# Altium PCB OksLab_CanToUsb_HW01.PcbDoc (part 1 of 2)
Units mm, origin at the board's own origin, x right, y up, seen from the top; angles counter-clockwise.
Board outline 66.93 x 34.29 mm, 2 copper layers (Top Layer, Bottom Layer), stack 1.57 mm thick; 51 components, 41 nets, 199 pads, 83 vias.
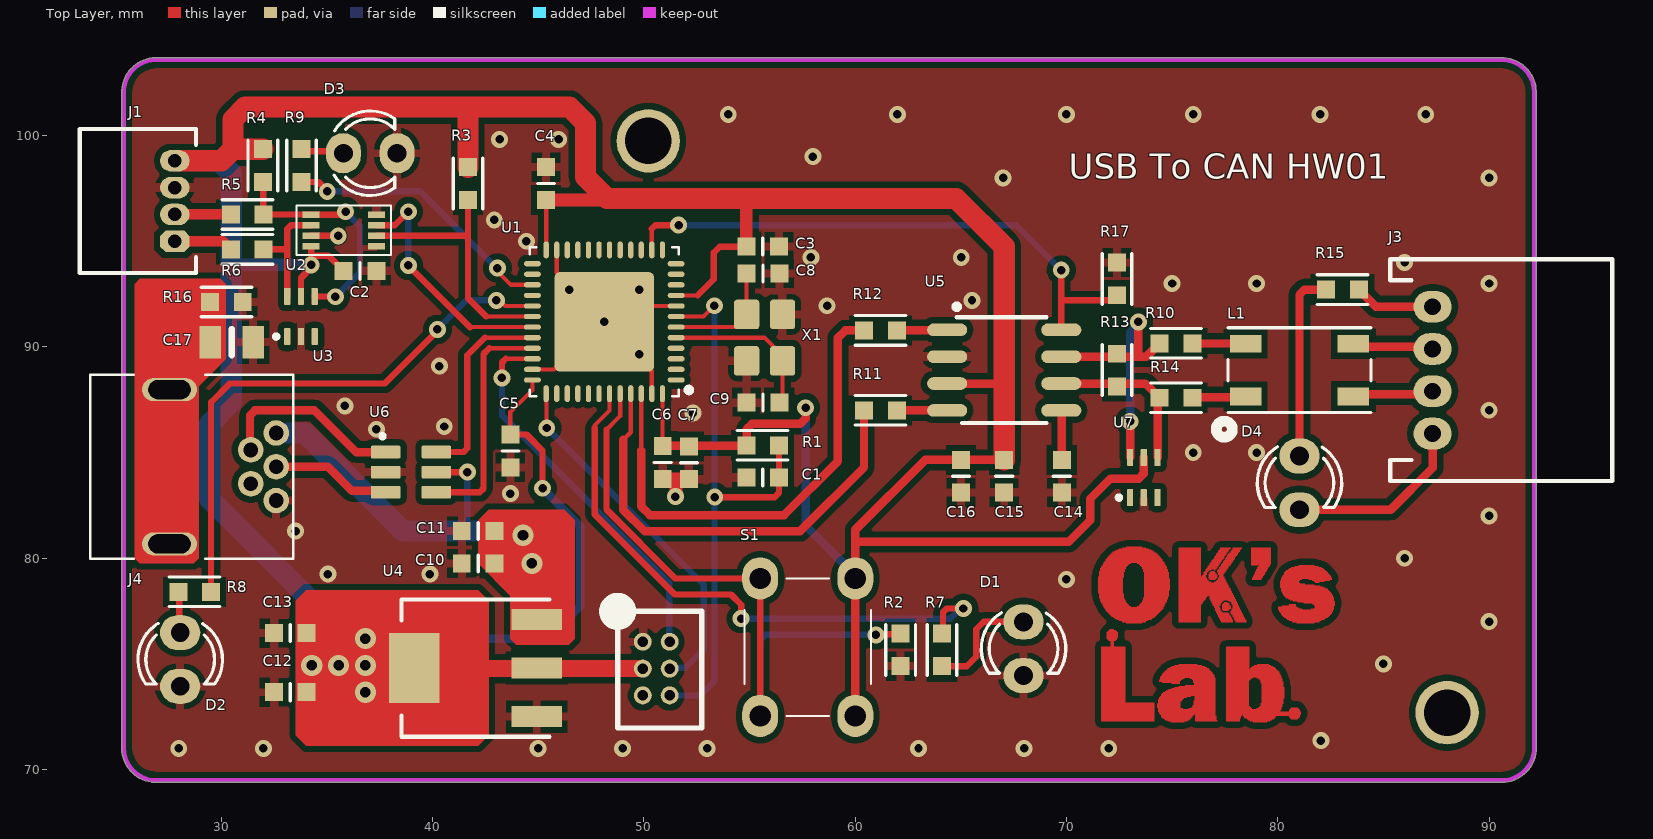
[diagram p0: Top Layer view]
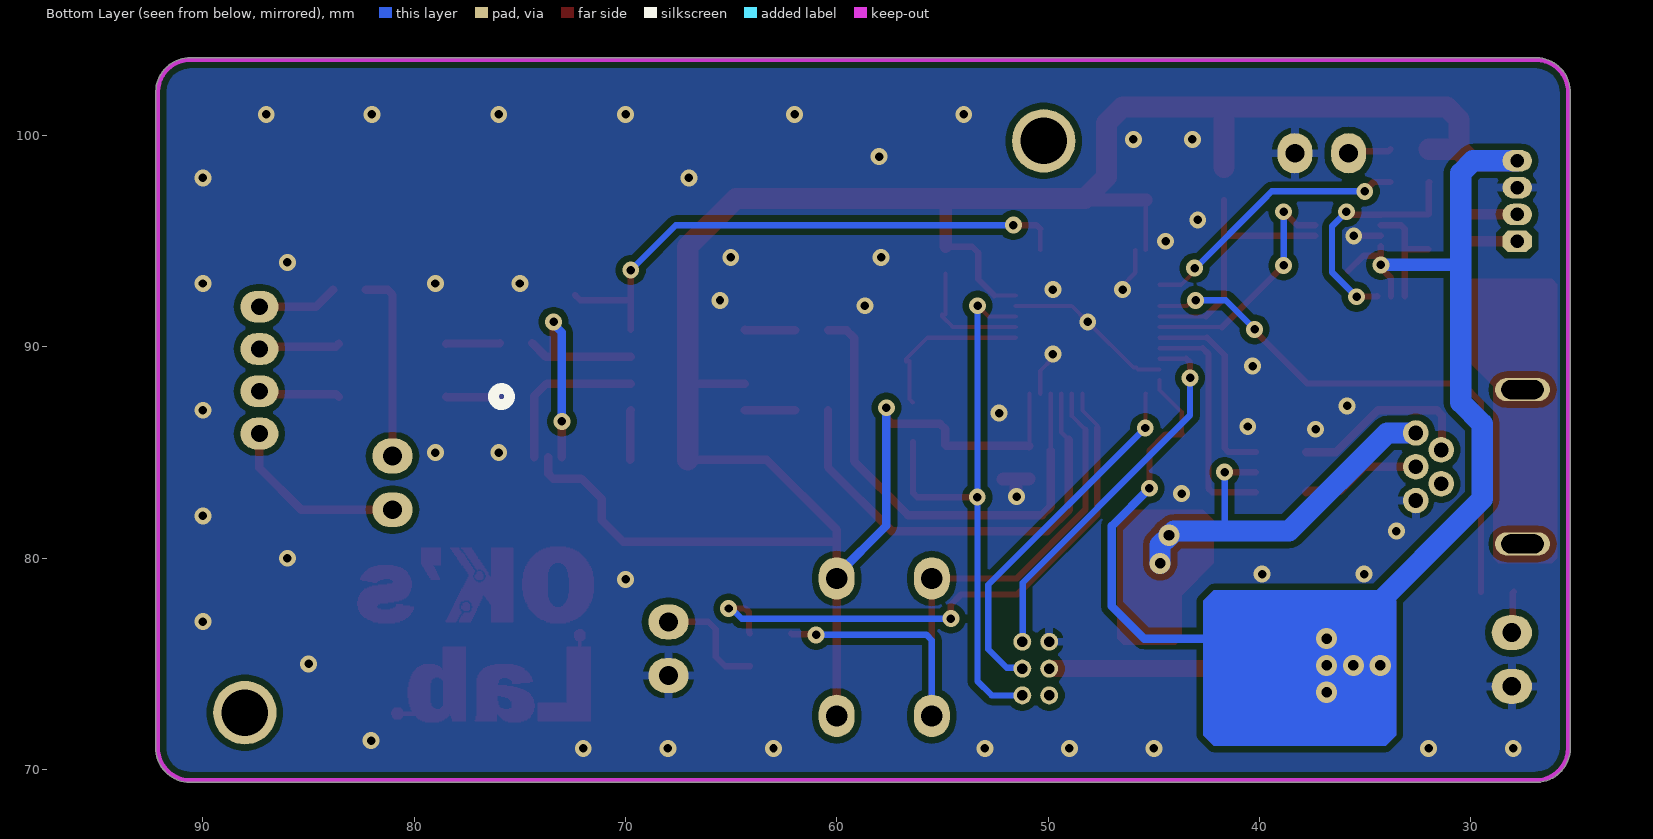
[diagram p1: Bottom Layer view, seen from below]
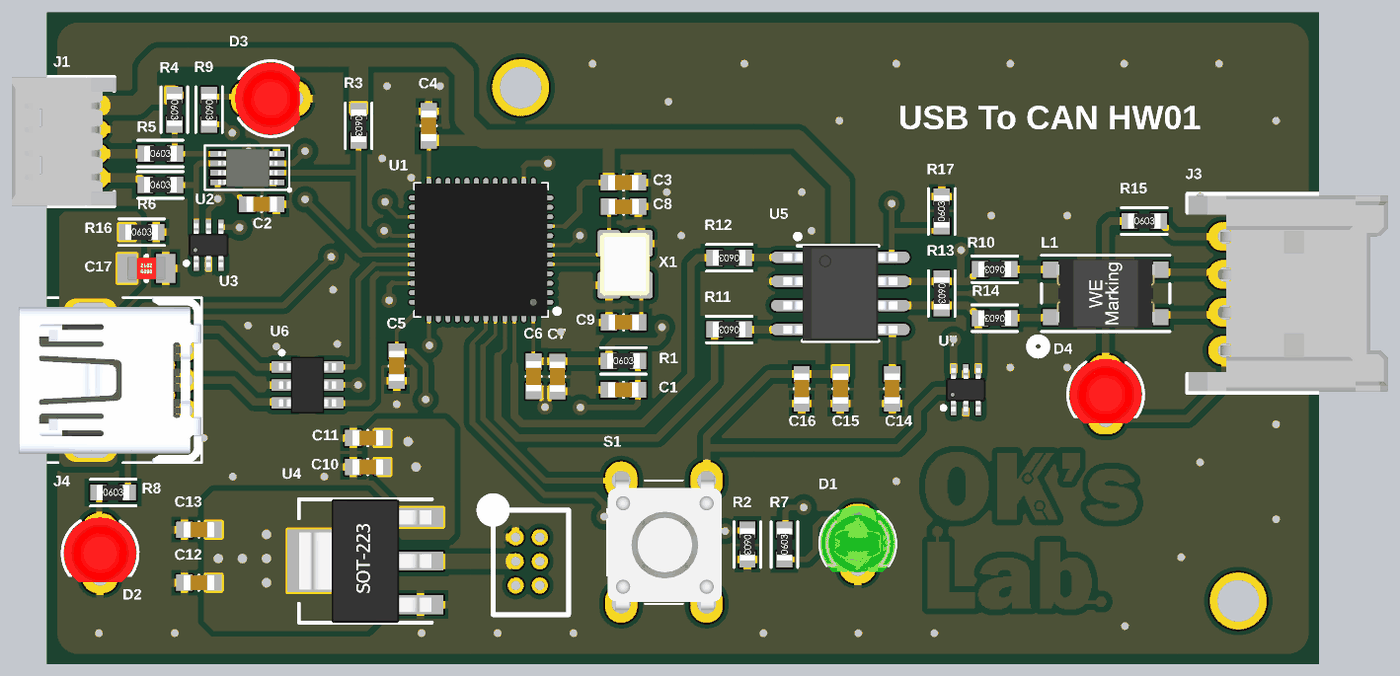
[diagram p2: 3D render of the assembled board from above, using the file's embedded part models]

## Layer stack, top to bottom
Top Solder: solder mask 0.01, Solder Resist, Dk 3.5
Top Layer: signal copper 0.035
Dielectric 1: dielectric 1.5, FR-4, Dk 4.8
Bottom Layer: signal copper 0.035
Bottom Solder: solder mask 0.01, Solder Resist, Dk 3.5

## Board outline
26.976,69.394 cw(c26.937,71.031) 25.3,70.991 cw(c25.4,70.993) 25.3,70.993 25.3,102.005 cw(c26.937,102.044) 26.896,103.682 cw(c26.899,103.581) 26.899,103.682 90.574,103.682 cw(c90.589,102.044) 90.604,103.682 90.678,103.682 cw(c90.678,103.581) 90.707,103.677 cw(c90.589,102.044) 92.226,102.085 cw(c92.126,102.082) 92.226,102.082 92.226,71.07 cw(c90.589,71.031) 92.227,71.031 cw(c90.589,71.031) 90.63,69.394 cw(c90.627,69.494) 90.627,69.394 26.976,69.394 ccw(c26.937,71.031)

## Design rules (kind name [scope] priority, off if disabled: settings)
Clearance Clearance_1 [InNamedPolygon('TOP_GND') Or InNamedPolygon('BOTTOM_GND')] p1: gap=0.3 ignorepadtopadclearanceinfootprint=FALSE
Clearance [All] p2: gap=0.2 ignorepadtopadclearanceinfootprint=FALSE
MinimumSolderMaskSliver [All] p1: minsoldermaskwidth=0.01
PolygonConnect PolygonConnect_1 [All vs IsNamedPolygon('TOP_GND') Or IsNamedPolygon('BOTTOM_GND')] p1: thpad.connectstyle=Relief thpad.reliefconductorwidth=0.4 thpad.reliefentries=4 thpad.polygonreliefangle="90 Angle" thpad.airgapwidth=0.254 smdpad.connectstyle=Relief smdpad.reliefconductorwidth=0.4 smdpad.reliefentries=4 smdpad.polygonreliefangle="90 Angle" smdpad.airgapwidth=0.254 via.connectstyle=Direct via.reliefconductorwidth=0.254 via.reliefentries=4 via.polygonreliefangle="90 Angle" via.airgapwidth=0.254
PolygonConnect [All] p2: connectstyle=Relief reliefconductorwidth=0.254 reliefentries=4 polygonreliefangle="90 Angle" airgapwidth=0.254
RoutingVias [All] p1: holewidth=0.4 width=0.8 viastyle="Through Hole" minholewidth=0.3 minwidth=0.6 maxholewidth=3 maxwidth=3
SilkToSilkClearance [All] p1: silktosilkclearance=0.1
SilkToSolderMaskClearance [IsPad] p1: minsilkscreentomaskgap=0.05 clearancetoexposedcopper=TRUE
SolderMaskExpansion [All] p1: expansion=0.102 istentingtop=FALSE
Width [All] p1: maxlimit=1.2 minlimit=0.2 preferedwidth=0.3
27 further rules are at their usual default settings.

## Components (designator, comment, footprint, x,y, rotation, side; value= is the part's Value field where it differs from the comment)
C1 "0.10µF" SMD-0603C 55.626,83.82 r270 top
C2 "0.10µF" SMD-0603C 36.576,93.599 r90 top
C3 "0.10µF" SMD-0603C 55.626,94.742 r90 top
C4 "0.10µF" SMD-0603C 45.37,97.727 r180 top
C5 "0.10µF" SMD-0603C 43.688,85.077 r0 top
C6 "0.10µF" SMD-0603C 50.898,84.534 r0 top
C7 "4.7µF" SMD-0603C 52.146,84.516 r0 top
C8 "16pF" SMD-0603C 55.639,93.472 r90 top
C9 "16pF" SMD-0603C 55.639,87.376 r270 top
C10 "4.7µF" SMD-0603C 42.164,79.756 r270 top
C11 "0.10µF" SMD-0603C 42.164,81.28 r270 top
C12 "4.7µF" SMD-0603C 33.274,73.66 r270 top
C13 "0.10µF" SMD-0603C 33.274,76.454 r270 top
C14 "0.10µF" SMD-0603C 69.78,83.878 r0 top
C15 "0.10µF" SMD-0603C 67.056,83.878 r0 top
C16 "1µF" SMD-0603C 65.012,83.878 r0 top
C17 "4700pF" SMD-0805C 30.505,90.221 r90 top
D1 "LN38GPX" Led-3mm-Green-h7 67.97,75.717 r270 top
D2 "LN28RPX" Led-3mm-Red-h7 28.067,75.209 r270 top
D3 "LN28RPX" Led-3mm-Red-h7 37.059,99.162 r0 top
D4 "LN28RPX" Led-3mm-Red-h7 81.026,83.566 r270 top
J1 "53048-0410" CONN_4_POS__0530480410 27.813,96.901 r270 top
J3 "0353630460" CONN_4_POS__0353630460 87.326,88.9 r90 top
J4 "2172034-1" USB_MINI__2172034-1 27.559,84.328 r180 top
L1 "744212510" "CM_6.50mm x 3.60mm" 81.026,88.9 r0 top
R1 "10k" SMD-0603-RES 55.626,85.344 r270 top
R2 "10k" SMD-0603-RES 62.154,75.667 r180 top
R3 "100k" SMD-0603-RES 41.681,97.727 r180 top
R4 "100k" SMD-0603-RES 31.979,98.577 r180 top
R5 "22" SMD-0603-RES 31.242,96.266 r270 top
R6 "22" SMD-0603-RES 31.242,94.615 r270 top
R7 "330" SMD-0603-RES 64.11,75.667 r0 top
R8 "330" SMD-0603-RES 28.753,78.41 r270 top
R9 "330" SMD-0603-RES 33.807,98.577 r180 top
R10 "330" SMD-0603-RES 75.184,90.17 r90 top
R11 "22" SMD-0603-RES 61.197,86.997 r90 top
R12 "22" SMD-0603-RES 61.197,90.782 r90 top
R13 "120" SMD-0603-RES 72.39,88.9 r180 top
R14 "330" SMD-0603-RES 75.184,87.593 r90 top
R15 "330" SMD-0603-RES 83.058,92.71 r270 top
R16 "1M" SMD-0603-RES 30.251,92.126 r270 top
R17 "10k" SMD-0603-RES 72.39,93.218 r0 top
S1 "DTS-66N-V" Tact_THD_6x6_13mm 57.76,75.794 r0 top
U1 "STM32F103C8T6" QFN48-(7mmX7mm) 48.133,91.186 r180 top
U2 "SN74AUP2G125DCUR" VFSOP_8 35.814,95.504 r180 top
U3 "NUP4202W1T2G" SOT-363 33.782,91.44 r0 top
U4 "LD1117S33CTR" SOT223-3N 42.037,74.803 r180 top
U5 "SN65HVD1050DR" SOIC-8_L 67.056,88.9 r0 top
U6 "USBLC6-2SC6" SOT23-6 38.989,84.074 r270 top
U7 "NUP4202W1T2G" SOT-363 73.66,83.82 r0 top
X1 "7M-16.000MAAJ-T" XTAL_3.2mm_2.5mm_4pad 55.718,90.436 r270 top

## Footprints (in the part's own frame and the unit in brackets; to place one, negate y for a bottom-side part, rotate by r counter-clockwise, add the part's x,y. Pads: shape width x height; smd on the part's side, far side on the other; paste and mask are expansions set on the pad)
"CM_6.50mm x 3.60mm" [mm]
  rect 1.499x0.838 smd: 1(-2.55,-1.25) 3(-2.55,1.25) 4(2.55,1.25) 5(2.55,-1.25)
  silkscreen extent -3.94,-3.17 3.38,2.01, body extent -2.6,-1.8 2.6,1.8, height 1.5
CONN_4_POS__0353630460 [mm]
  oval 1.5x1.8 hole 0.8: 1(-3,0) 2(-1,0) 3(1,0) 4(3,0)
  silkscreen extent -5.25,-8.5 5.25,2, body extent -5.15,-8.55 5.15,1.95, height 5.55
CONN_4_POS__0530480410 [mil]
  oct 40x55 hole 25: 1(75,0)
  oval 40x55 hole 25: 2(25,0) 3(-25,0) 4(-75,0)
  silkscreen extent -134,-177 134,39, body extent -133,-173 133,43, height 140
Led-3mm-Green-h7 [mil]
  oval 65x75 hole 35: 1(-50,0) 2(50,0)
  silkscreen extent -67,-79 46,79, body extent -78,-78 62,78, height 354
Led-3mm-Red-h7 [mil]
  oval 65x75 hole 35: 1(-50,0) 2(50,0)
  silkscreen extent -67,-79 46,79, body extent -75,-75 60,75, height 261
QFN48-(7mmX7mm) [mm] "QFN, 48-Leads, Body 7,1x7,1mm (max), Pitch 0,50mm, IPC Medium Density"
  rrect10% 4.7x4.7 smd mask+0.076: 0(0,0)
  oval 0.8x0.25 smd mask+0.076: 1(-3.4,2.75) 2(-3.4,2.25) 3(-3.4,1.75) 4(-3.4,1.25) 5(-3.4,0.75) 6(-3.4,0.25) 7(-3.4,-0.25) 8(-3.4,-0.75) 9(-3.4,-1.25) 10(-3.4,-1.75) 11(-3.4,-2.25) 12(-3.4,-2.75) 25(3.4,-2.75) 26(3.4,-2.25) 27(3.4,-1.75) 28(3.4,-1.25) 29(3.4,-0.75) 30(3.4,-0.25) 31(3.4,0.25) 32(3.4,0.75) 33(3.4,1.25) 34(3.4,1.75) 35(3.4,2.25) 36(3.4,2.75)
  oval 0.25x0.8 smd mask+0.076: 13(-2.75,-3.4) 14(-2.25,-3.4) 15(-1.75,-3.4) 16(-1.25,-3.4) 17(-0.75,-3.4) 18(-0.25,-3.4) 19(0.25,-3.4) 20(0.75,-3.4) 21(1.25,-3.4) 22(1.75,-3.4) 23(2.25,-3.4) 24(2.75,-3.4) 37(2.75,3.4) 38(2.25,3.4) 39(1.75,3.4) 40(1.25,3.4) 41(0.75,3.4) 42(0.25,3.4) 43(-0.25,3.4) 44(-0.75,3.4) 45(-1.25,3.4) 46(-1.75,3.4) 47(-2.25,3.4) 48(-2.75,3.4)
  silkscreen extent -4.13,-3.53 3.53,3.52, body extent -3.51,-3.51 3.51,3.51, height 0.78
SMD-0603-RES [mm]
  rect 0.85x0.85 smd: 1(0,0.775) 2(0,-0.775)
  silkscreen extent -0.7,-1.2 0.7,1.2, body extent -0.4,-0.85 0.4,0.85, height 0.56
SMD-0603C [mm]
  rect 0.85x0.85 smd: 1(0,0.775) 2(0,-0.775)
  silkscreen extent -0.4,0 0.4,0, body extent -0.4,-0.8 0.4,0.8, height 0.9
SMD-0805C [mil]
  rect 60x40 smd: 1(0,40) 2(0,-40)
  silkscreen extent -25,0 25,0, body extent -25,-39 25,39, height 35
SOIC-8_L [mm] "SOIC, 8-Leads, Body 4.9x3.9mm, Pitch 1.27mm, IPC High Density"
  oval 1.9x0.6 smd: 1(-2.7,1.905) 2(-2.7,0.635) 3(-2.7,-0.635) 4(-2.7,-1.905) 5(2.7,-1.905) 6(2.7,-0.635) 7(2.7,0.635) 8(2.7,1.905)
  silkscreen extent -2.37,-2.5 2,3.12, body extent -3.01,-2.5 3.01,2.5, height 1.75
SOT23-6 [mm] "SOT-23/SC-74A; 5 Leads; Body 3 x 3 mm, inc. leads (LxW max)"
  rrect20% 0.6x1.4 smd mask+0.076: 1(-0.95,-1.2) 2(0,-1.2) 3(0.95,-1.2) 4(0.95,1.2) 5(0,1.2) 6(-0.95,1.2)
  silkscreen extent -1.8,-1.45 -1.6,-1.25, body extent -1.5,-1.5 1.5,1.5, height 1.44
SOT223-3N [mm] "SOT223/SC73, 4-Leads, Body 6.5x3.5mm, Pitch 2.3mm, Lead Span 7mm, IPC Medium Density"
  rect 2.4x1 smd: 1(-2.9,2.3) 2(-2.9,0) 3(-2.9,-2.3)
  rect 2.4x3.3 smd: 2(2.9,0)
  silkscreen extent -3.5,-3.25 3.5,3.25, body extent -3.48,-3.25 3.48,3.25, height 1.68
SOT-363 [mm]
  rrect25% 0.3x0.8 smd mask+0.051: 1(-0.65,-0.95) 2(0,-0.95) 3(0.65,-0.95) 4(0.65,0.95) 5(0,0.95) 6(-0.65,0.95)
  silkscreen extent -1.27,-1.05 -1.08,-0.85, body extent -1.05,-1.15 1.05,1.15, height 1
Tact_THD_6x6_13mm [mm]
  oval 1.7x2 hole 1: 1(-2.25,-3.25) 2(-2.25,3.25) 3(2.25,-3.25) 4(2.25,3.25)
  silkscreen extent -3,-3.25 3,3.25, body extent -2.95,-4.1 3.05,3.8, height 13.11
USB_MINI__2172034-1 [mm]
  oval 2.6x1.1 hole 0.9 slot 2 at 0 deg: 0(0,3.65) 0(0,-3.65)
  round 1.208 hole 0.7: 1(-5.05,-1.6) 2(-3.85,-0.8) 3(-5.05,0) 4(-3.85,0.8) 5(-5.05,1.6)
  silkscreen extent -5.85,-4.35 3.75,4.35, body extent -5.85,-4.35 3.75,4.35, height 4.14
VFSOP_8 [mm]
  round 0.3 on Top Overlay: 0(-2.22,1.15)
  rect 0.8x0.3 smd: 1(-1.55,0.75) 2(-1.55,0.25) 3(-1.55,-0.25) 4(-1.55,-0.75) 5(1.55,-0.75) 6(1.55,-0.25) 7(1.55,0.25) 8(1.55,0.75)
  silkscreen extent -2.22,-1.19 2.24,1.15, body extent -1.59,-1.01 1.52,0.99, height 0.9
XTAL_3.2mm_2.5mm_4pad [mm]
  rrect25% 1.4x1.2 smd mask+0.102: 1(-1.1,-0.85) 2(1.1,-0.85) 3(1.1,0.85) 4(-1.1,0.85)
  body extent -1.65,-1.3 1.65,1.3, height 0.81

## Part data
C1 C2 C3 C4 C5 C6 C11 C13 C14 C15: library part GCJ188R71H104KA12D, "CAP CER 0.1UF 50V X7R 0603", Digi-Key Part Number=490-5798-1-ND, Manufacturer="Murata Electronics North America", Operating Temperature="-55°C ~ 125°C", Package / Case="0603 (1608 Metric)", Ratings=AEC-Q200, Temperature Coefficient=X7R, Tolerance=±10%, Voltage=50V, @ qty=0, Applications="Automotive, Boardflex Sensitive", Datasheets=http://www.murata.com/~/media/webrenewal/support/library/catalog/products/capacitor/mlcc/c03e.ashx, Factory Stock=0, Features="Soft Termination", Height - Seated (Max)=-, Lead Spacing=-, Lead Style=-, Minimum Quantity=1, Mounting Type="Surface Mount, MLCC", Packaging="Cut Tape (CT)", Part Status=Active, Quantity Available=163695, Series=GCJ, Size / Dimension="0.063\" L x 0.031\" W (1.60mm x 0.80mm)", Thickness (Max)="0.035\" (0.90mm)", Unit Price (USD)=0.12, Image=//media.digikey.com/Renders/Murata%20Renders/0603%28LQG18%29.jpg
  C1 C3 C4 C5 C6 C11 C13 C14 C15: Part Number=GCJ188R71H104KA12D
  C2: Manufacturer Part Number=GCJ188R71H104KA12D
C7 C10 C12: library part GRM188R61C475KAAJD, "CAP CER 4.7UF 16V X5R 0603", Digi-Key Part Number=490-10481-1-ND, Manufacturer="Murata Electronics North America", Operating Temperature="-55°C ~ 85°C", Package / Case="0603 (1608 Metric)", Ratings=-, Temperature Coefficient=X5R, Tolerance=±10%, Voltage=16V, @ qty=0, Applications="General Purpose", Datasheets=http://www.murata.com/~/media/webrenewal/support/library/catalog/products/capacitor/mlcc/c02e.pdf, Factory Stock=0, Features="Derating Recommended", Height - Seated (Max)=-, Lead Spacing=-, Lead Style=-, Minimum Quantity=1, Mounting Type="Surface Mount, MLCC", Packaging="Cut Tape (CT)", Part Number=GRM188R61C475KAAJD, Part Status=Active, Quantity Available=5977, Series=GRM, Size / Dimension="0.063\" L x 0.031\" W (1.60mm x 0.80mm)", Thickness (Max)="0.037\" (0.95mm)", Unit Price (USD)=0.3, Image=//media.digikey.com/Renders/Murata%20Renders/ZRB-SERIES-0402.jpg
C8 C9: library part GCM1885C1H160JA16D, "CAP CER 16PF 50V NP0 0603", Digi-Key Part Number=490-8003-1-ND, Manufacturer="Murata Electronics North America", Operating Temperature="-55°C ~ 125°C", Package / Case="0603 (1608 Metric)", Ratings=AEC-Q200, Temperature Coefficient="C0G, NP0", Tolerance=±5%, Voltage=50V, @ qty=0, Applications=Automotive, Datasheets=http://www.murata.com/~/media/webrenewal/support/library/catalog/products/capacitor/mlcc/c03e.ashx, Factory Stock=0, Features=-, Height - Seated (Max)=-, Lead Spacing=-, Lead Style=-, Minimum Quantity=1, Mounting Type="Surface Mount, MLCC", Packaging="Cut Tape (CT)", Part Number=GCM1885C1H160JA16D, Part Status=Active, Quantity Available=25223, Series=GCM, Size / Dimension="0.063\" L x 0.031\" W (1.60mm x 0.80mm)", Thickness (Max)="0.035\" (0.90mm)", Unit Price (USD)=0.11, Image=//media.digikey.com/Renders/Murata%20Renders/0603%28GCM188%29.jpg
C16: library part GCM188R71C105KA64D, "CAP CER 1UF 16V X7R 0603", Digi-Key Part Number=490-5241-1-ND, Manufacturer="Murata Electronics North America", Operating Temperature="-55°C ~ 125°C", Package / Case="0603 (1608 Metric)", Ratings=AEC-Q200, Temperature Coefficient=X7R, Tolerance=±10%, Voltage=16V, @ qty=0, Applications=Automotive, Datasheets=http://www.murata.com/~/media/webrenewal/support/library/catalog/products/capacitor/mlcc/c03e.ashx, Factory Stock=0, Features=-, Height - Seated (Max)=-, Lead Spacing=-, Lead Style=-, Minimum Quantity=1, Mounting Type="Surface Mount, MLCC", Packaging="Cut Tape (CT)", Part Number=GCM188R71C105KA64D, Part Status=Active, Quantity Available=9243, Series=GCM, Size / Dimension="0.063\" L x 0.031\" W (1.60mm x 0.80mm)", Thickness (Max)="0.035\" (0.90mm)", Unit Price (USD)=0.24, Image=//media.digikey.com/Renders/Murata%20Renders/0603%28GCM188%29.jpg
C17: library part GRM21AR72E472KW01D, "CAP CER 4700PF 250V X7R 0805", Digi-Key Part Number=490-3532-1-ND, Manufacturer="Murata Electronics North America", Operating Temperature="-55°C ~ 125°C", Package / Case="0805 (2012 Metric)", Ratings=-, Temperature Coefficient=X7R, Tolerance=±10%, Voltage=250V, @ qty=0, Applications="General Purpose", Datasheets=http://www.murata.com/~/media/webrenewal/support/library/catalog/products/capacitor/mlcc/c02e.pdf, Factory Stock=0, Features=-, Height - Seated (Max)=-, Lead Spacing=-, Lead Style=-, Manufacturer Part Number=GRM21AR72E472KW01D, Minimum Quantity=1, Mounting Type="Surface Mount, MLCC", Packaging="Cut Tape (CT)", Part Status=Active, Quantity Available=18270, Series=GRM, Size / Dimension="0.079\" L x 0.049\" W (2.00mm x 1.25mm)", Thickness (Max)="0.039\" (1.00mm)", Unit Price (USD)=0.12, Image=//media.digikey.com/Renders/Murata%20Renders/0805%20(2012%20Metric)%20.85mm.jpg
D1: library part LED_GREEN__LN38GPX, "LED GREEN 3MM ROUND T/H", Base Part Number=LN*8, Color=Green, Current - Test=20mA, Lens Color=-, Manufacturer="Panasonic Electronic Components", Millicandela Rating=6mcd, Package / Case=Radial, Supplier Device Package="Round Type", Supplier Part Number 1=P564-ND, Voltage - Forward (Vf) (Typ)=2.2V, Category=Optoelectronics, ComponentLink1Description=https://media.digikey.com/pdf/Data%20Sheets/Panasonic%20LEDs%20PDFs/LN38GPX_Rev_Mar_2012.pdf, ComponentLink1URL=https://media.digikey.com/pdf/Data%20Sheets/Panasonic%20LEDs%20PDFs/LN38GPX_Rev_Mar_2012.pdf, Configuration=Standard, Features=-, Height (Max)=5.70mm, Lens Size="3mm, T-1", Lens Style="Round with Domed Top", Lens Transparency=-, Manufacturer Part Number=LN38GPX, Mounting Type="Through Hole", Packaging=Bulk, Part Status=Obsolete, Pricing 1="1400=0 (USD)", RoHS="RoHS Compliant", Size / Dimension=-, Stock 1=0, Supplier 1=Digi-Key, Viewing Angle=-, Wavelength - Dominant=-, Wavelength - Peak=565nm
D2 D3 D4: library part LED_RED__LN28RPX, "LED RED DIFF 3MM ROUND T/H", Color=Red, Current - Test=15mA, Manufacturer="Panasonic Electronic Components", Millicandela Rating=2.8mcd, Package / Case=Radial, Supplier Device Package="3mm Round", Supplier Part Number=P563-ND, Voltage - Forward (Vf) (Typ)=2.2V, Category=Optoelectronics, ComponentLink1Description=http://industrial.panasonic.com/www-cgi/jvcr13pz.cgi?E+SC+4+ATA7001+LN28RPX+8+WW, ComponentLink1URL=http://industrial.panasonic.com/www-cgi/jvcr13pz.cgi?E+SC+4+ATA7001+LN28RPX+8+WW, Features=-, Height (Max)=5.70mm, Lens Color=Red, Lens Style/Size="Round with Domed Top, 3mm (T-1), 3.00mm", Lens Transparency=Diffused, Manufacturer Part Number=LN28RPX, Mounting Type="Through Hole", Packaging=Bulk, Part Status="Not For New Designs", Pricing="1=0.45, 10=0.326, 25=0.2664, 100=0.213, 250=0.17972, 500=0.15308, 1000=0.11981, 2500=0.10982, 5000=0.09984 (USD)", RoHS="RoHS Compliant", Size / Dimension=-, Supplier=Digi-Key, Viewing Angle=-, Wavelength - Dominant=-, Wavelength - Peak=700nm
J1: library part CONN_4_POS__0530480410, "CONN HEADER R/A 4POS 1.25MM", Case/Package=0410, Color=Natural, Contact Resistance=20mR, Current Rating=1A, Flammability Rating="UL94 V-0", Manufacturer=Molex, Max Operating Temperature=85°C, Min Operating Temperature=-40°C, Package Quantity=5000, Voltage Rating=125V, Insulation Resistance=100MR, ComponentLink1Description=https://www.distrelec.biz/Web/Downloads/60/_e/gg116847-116860_e.pdf?mime=application%2Fpdf&src-supplier=Distrelec, ComponentLink1URL=https://www.distrelec.biz/Web/Downloads/60/_e/gg116847-116860_e.pdf?mime=application%2Fpdf&src-supplier=Distrelec, ComponentLink2Description=http://uk.rs-online.com/webdocs/1362/0900766b81362ba7.pdf?src-supplier=RSComponents, ComponentLink2URL=http://uk.rs-online.com/webdocs/1362/0900766b81362ba7.pdf?src-supplier=RSComponents, ComponentLink3Description=http://www.molex.com/webdocs/datasheets/pdf/en-us/0530480410_PCB_HEADERS.pdf?src-supplier=Avnet, ComponentLink3URL=http://www.molex.com/webdocs/datasheets/pdf/en-us/0530480410_PCB_HEADERS.pdf?src-supplier=Avnet, ComponentLink4Description=http://www.mouser.com/ds/2/276/0530480410_PCB_HEADERS-170930.pdf?src-supplier=Mouser, ComponentLink4URL=http://www.mouser.com/ds/2/276/0530480410_PCB_HEADERS-170930.pdf?src-supplier=Mouser, Connector Type="Blade Pin", Contact Gender=Male, Contact Material=Bronze,Tin, Contact Plating=Tin, Contact Type="Blade Pin", Depth=5.5mm, Gender=Male, Glow Wire Compliant=Non-compliant, Housing Color=Natural, Housing Material=Nylon, Lead Free="Lead Free", Manufacturer Part Number=53048-0410, Mount="Through Hole", Number of Circuits=4, Number of Contacts=4, Number of Positions=4, Number of Rows=1, Orientation="Right Angle", Packaging=Tray, Pitch=1.25mm, Pricing 1="1=0.1232 (USD)", Radiation Hardening=No, REACH SVHC=Unknown, RoHS Compliant=Yes, Series=PicoBlade, Stock 1=44, Supplier 1=Avnet, Supplier Part Number 1=53048-0410, Termination=Solder, Voltage Rating (DC)=125V
J3: library part CONN_4_POS__0353630460, "CONN HEADER 4POS 2MM R/A TIN", Current Rating=-, Manufacturer="Molex Connector Corporation", Material Flammability Rating="UL94 V-0", Supplier Part Number=WM18933-ND, Insulation Color=Natural, Applications="Automotive, General Purpose", Category="Connectors, Interconnects", ComponentLink1Description=http://www.molex.com/pdm_docs/sd/353630460_sd.pdf, ComponentLink1URL=http://www.molex.com/pdm_docs/sd/353630460_sd.pdf, Connector Type=Header, Contact Finish - Mating=Tin, Contact Finish - Post=Tin, Contact Finish Thickness - Mating="78.7µin (2.00µm)", Contact Finish Thickness - Post="78.7µin (2.00µm)", Contact Length - Mating="0.145\" (3.70mm)", Contact Length - Post="0.126\" (3.20mm)", Contact Material=Brass, Contact Shape=Square, Contact Type="Male Pin", Fastening Type="Locking Ramp", Features=-, Manufacturer Part Number=0353630460, Mated Stacking Heights=-, Mounting Type="Through Hole, Right Angle", Number of Positions=4, Number of Positions Loaded=All, Number of Rows=1, Operating Temperature=-, Overall Contact Length=-, Packaging=Bulk, Part Status=Active, Pitch - Mating="0.079\" (2.00mm)", Pricing="1=0.48, 10=0.455, 100=0.3184, 500=0.27294, 1000=0.22745, 5000=0.19496, 10000=0.18196 (USD)", RoHS="RoHS Compliant", Row Spacing - Mating=-, Shrouding="Shrouded - 4 Wall", Style="Board to Cable/Wire", Supplier=Digi-Key, Termination="Kinked Pin, Solder", Voltage Rating=-, Ingress Protection=-, Insulation Height="0.217\" (5.51mm)", Insulation Material="Polyamide (PA), Nylon"
J4: library part USB_MINI__2172034-1, "CONN RCPT USB2.0 MINI B 5P R/A", Housing Color=Black, Manufacturer="TE Connectivity AMP", Package Quantity=95, ComponentLink1Description=http://www.te.com/commerce/DocumentDelivery/DDEController?Action=srchrtrv&DocNm=2172034&DocType=Customer+Drawing&DocLang=English&src-supplier=Digi-Key, ComponentLink1URL=http://www.te.com/commerce/DocumentDelivery/DDEController?Action=srchrtrv&DocNm=2172034&DocType=Customer+Drawing&DocLang=English&src-supplier=Digi-Key, ComponentLink2Description=http://www.mouser.com/ds/2/418/NG_CD_2172034_A-624684.pdf?src-supplier=Mouser, ComponentLink2URL=http://www.mouser.com/ds/2/418/NG_CD_2172034_A-624684.pdf?src-supplier=Mouser, ComponentLink3Description=https://www.te.com/commerce/DocumentDelivery/DDEController?Action=srchrtrv&DocNm=2172034&DocType=Customer+Drawing&DocLang=English&src-supplier=Digi-Key, ComponentLink3URL=https://www.te.com/commerce/DocumentDelivery/DDEController?Action=srchrtrv&DocNm=2172034&DocType=Customer+Drawing&DocLang=English&src-supplier=Digi-Key, Connector Type=Receptacle, Contact Plating=Gold, ELV=Compliant, Gender=Female, Housing Material=PBT, Manufacturer Part Number=2172034-1, Number of Ports=1, Number of Positions=5, Orientation="Right Angle", Packaging=Tray, PCB Thickness=1.6mm, Plating=Nickel, Plating Thickness=0.762um, Pricing 1="13110=0.5326, 26220=0.5141, 52440=0.4965, 78660=0.4789, 104880=0.4613, 131100=0.4437, 1311000=0.4261 (USD)", RoHS Compliant=Yes, Stock 1=0, Supplier 1=Avnet, Supplier Part Number 1=2172034-1, Tail Length=2.84mm, Termination="Through Hole"
L1: library part CM__744212510, "Common Mode Filters / Chokes WE-SL1 SMD Ln Filter 2x51uH 300ohm", Case/Package=SMD/SMT, Current=300mA, DC Resistance (DCR)=160mR, Manufacturer="Wurth Electronics", Max Operating Temperature=105°C, Min Operating Temperature=-40°C, Package Quantity=1000, Supplier Part Number 1=732-3941-6-ND, Test Frequency=100kHz, Tolerance=50%, Voltage Rating (DC)=80V, Inductance=51uH, Category="Fixed Inductors", ComponentLink1Description=https://datasheet.ciiva.com/11800/0900766b8059564e-11800467.pdf?src-supplier=RSComponents, ComponentLink1URL=https://datasheet.ciiva.com/11800/0900766b8059564e-11800467.pdf?src-supplier=RSComponents, ComponentLink2Description=https://datasheet.ciiva.com/6048/1735560-6048484.pdf?src-supplier=Farnell, ComponentLink2URL=https://datasheet.ciiva.com/6048/1735560-6048484.pdf?src-supplier=Farnell, ComponentLink3Description=https://datasheet.ciiva.com/1130/744212510-1130407.pdf?src-supplier=Newark, ComponentLink3URL=https://datasheet.ciiva.com/1130/744212510-1130407.pdf?src-supplier=Newark, ComponentLink4Description=https://datasheet.ciiva.com/4952/744212510-77598-4952687.pdf?src-supplier=Mouser, ComponentLink4URL=https://datasheet.ciiva.com/4952/744212510-77598-4952687.pdf?src-supplier=Mouser, ComponentLink5Description=https://datasheet.ciiva.com/7764/1735560-7764951.pdf?src-supplier=Element14, ComponentLink5URL=https://datasheet.ciiva.com/7764/1735560-7764951.pdf?src-supplier=Element14, ComponentLink6Description=https://datasheet.ciiva.com/6216/744212510-6216346.pdf?src-supplier=Digi-Key, ComponentLink6URL=https://datasheet.ciiva.com/6216/744212510-6216346.pdf?src-supplier=Digi-Key, ComponentLink7Description=https://datasheet.ciiva.com/22705/1735560-22705131.pdf?src-supplier=Element14, ComponentLink7URL=https://datasheet.ciiva.com/22705/1735560-22705131.pdf?src-supplier=Element14, ComponentLink8Description=https://datasheet.ciiva.com/6216/744212510-6216348.pdf?src-supplier=Digi-Key, ComponentLink8URL=https://datasheet.ciiva.com/6216/744212510-6216348.pdf?src-supplier=Digi-Key, Core Material=Ferrite, Current Rating=300mA, Depth=3.6mm, Height=1.65mm, Lead Free="Lead Free", Length=6.5mm, Manufacturer Part Number=744212510, Max DC Current=300mA, Mount="Surface Mount", Number of Lines=2, Number of Pins=4, Packaging="Tape and Reel", Pricing 1="1=4,37000, 10=4,31200, 50=3,89500, 100=3,75600, 500=3,47800 (USD)", REACH SVHC="No SVHC", RoHS=Yes, RoHS Compliant=Yes, Series=WE-SL1, Supplier 1=Digi-Key, Termination=SMD/SMT, Width=0.142inch, Impedance=300R, Inductance Tolerance=50%
R1 R2 R17: library part ERJ-3EKF1002V, "RES SMD 10K OHM 1% 1/10W 0603", Digi-Key Part Number=P10.0KHCT-ND, Manufacturer="Panasonic Electronic Components", Operating Temperature="-55°C ~ 155°C", Package / Case="0603 (1608 Metric)", Power (Watts)="0.1W, 1/10W", Supplier Device Package=0603, Temperature Coefficient=±100ppm/°C, Tolerance=±1%, @ qty=1500, Composition="Thick Film", Datasheets=http://industrial.panasonic.com/www-cgi/jvcr13pz.cgi?E+PZ+3+AOA0002+ERJ3EKF1002V+7+WW, Factory Stock=0, Failure Rate=-, Features="Automotive AEC-Q200", Height - Seated (Max)="0.022\" (0.55mm)", Minimum Quantity=1, Number of Terminations=2, Packaging="Cut Tape (CT)", Part Number=ERJ-3EKF1002V, Part Status=Active, Quantity Available=6703141, Series=ERJ, Size / Dimension="0.063\" L x 0.031\" W (1.60mm x 0.80mm)", Unit Price (USD)=0.00379, Image=//media.digikey.com/Photos/Panasonic%20Photos/MFG_ERJ-P6W%20Series.jpg
R3 R4: library part ERJ-3EKF1003V, "RES SMD 100K OHM 1% 1/10W 0603", Digi-Key Part Number=P100KHCT-ND, Manufacturer="Panasonic Electronic Components", Operating Temperature="-55°C ~ 155°C", Package / Case="0603 (1608 Metric)", Power (Watts)="0.1W, 1/10W", Supplier Device Package=0603, Temperature Coefficient=±100ppm/°C, Tolerance=±1%, @ qty=1500, Composition="Thick Film", Datasheets=http://industrial.panasonic.com/www-cgi/jvcr13pz.cgi?E+PZ+3+AOA0002+ERJ3EKF1003V+7+WW, Factory Stock=0, Failure Rate=-, Features="Automotive AEC-Q200", Height - Seated (Max)="0.022\" (0.55mm)", Minimum Quantity=1, Number of Terminations=2, Packaging="Cut Tape (CT)", Part Number=ERJ-3EKF1003V, Part Status=Active, Quantity Available=2179804, Series=ERJ, Size / Dimension="0.063\" L x 0.031\" W (1.60mm x 0.80mm)", Unit Price (USD)=0.00379, Image=//media.digikey.com/Photos/Panasonic%20Photos/MFG_ERJ-P6W%20Series.jpg
R5 R6 R11 R12: library part ERJ-3EKF22R0V, "RES SMD 22 OHM 1% 1/10W 0603", Digi-Key Part Number=P22.0HCT-ND, Manufacturer="Panasonic Electronic Components", Operating Temperature="-55°C ~ 155°C", Package / Case="0603 (1608 Metric)", Power (Watts)="0.1W, 1/10W", Supplier Device Package=0603, Temperature Coefficient=±100ppm/°C, Tolerance=±1%, @ qty=1500, Composition="Thick Film", Datasheets=http://industrial.panasonic.com/www-cgi/jvcr13pz.cgi?E+PZ+3+AOA0002+ERJ3EKF22R0V+7+WW, Factory Stock=0, Failure Rate=-, Features="Automotive AEC-Q200", Height - Seated (Max)="0.022\" (0.55mm)", Minimum Quantity=1, Number of Terminations=2, Packaging="Cut Tape (CT)", Part Number=ERJ-3EKF22R0V, Part Status=Active, Quantity Available=100321, Series=ERJ, Size / Dimension="0.063\" L x 0.031\" W (1.60mm x 0.80mm)", Unit Price (USD)=0.00379, Image=//media.digikey.com/Photos/Panasonic%20Photos/MFG_ERJ-P6W%20Series.jpg
R7 R8 R9 R10 R14 R15: library part ERJ-3EKF3300V, "RES SMD 330 OHM 1% 1/10W 0603", Digi-Key Part Number=P330HCT-ND, Manufacturer="Panasonic Electronic Components", Operating Temperature="-55°C ~ 155°C", Package / Case="0603 (1608 Metric)", Power (Watts)="0.1W, 1/10W", Supplier Device Package=0603, Temperature Coefficient=±100ppm/°C, Tolerance=±1%, @ qty=1500, Composition="Thick Film", Datasheets=http://industrial.panasonic.com/www-cgi/jvcr13pz.cgi?E+PZ+3+AOA0002+ERJ3EKF3300V+7+WW, Factory Stock=0, Failure Rate=-, Features="Automotive AEC-Q200", Height - Seated (Max)="0.022\" (0.55mm)", Minimum Quantity=1, Number of Terminations=2, Packaging="Cut Tape (CT)", Part Number=ERJ-3EKF3300V, Part Status=Active, Quantity Available=670984, Series=ERJ, Size / Dimension="0.063\" L x 0.031\" W (1.60mm x 0.80mm)", Unit Price (USD)=0.00379, Image=//media.digikey.com/Photos/Panasonic%20Photos/MFG_ERJ-P6W%20Series.jpg
R13: library part ERJ-3EKF1200V, "RES SMD 120 OHM 1% 1/10W 0603", Digi-Key Part Number=P120HCT-ND, Manufacturer="Panasonic Electronic Components", Operating Temperature="-55°C ~ 155°C", Package / Case="0603 (1608 Metric)", Power (Watts)="0.1W, 1/10W", Supplier Device Package=0603, Temperature Coefficient=±100ppm/°C, Tolerance=±1%, @ qty=1500, Composition="Thick Film", Datasheets=http://industrial.panasonic.com/www-cgi/jvcr13pz.cgi?E+PZ+3+AOA0002+ERJ3EKF1200V+7+WW, Factory Stock=0, Failure Rate=-, Features="Automotive AEC-Q200", Height - Seated (Max)="0.022\" (0.55mm)", Minimum Quantity=1, Number of Terminations=2, Packaging="Cut Tape (CT)", Part Number=ERJ-3EKF1200V, Part Status=Active, Quantity Available=84623, Series=ERJ, Size / Dimension="0.063\" L x 0.031\" W (1.60mm x 0.80mm)", Unit Price (USD)=0.00379, Image=//media.digikey.com/Photos/Panasonic%20Photos/MFG_ERJ-P6W%20Series.jpg
R16: library part ERJ-3EKF1004V, "RES SMD 1M OHM 1% 1/10W 0603", Digi-Key Part Number=P1.00MHCT-ND, Manufacturer="Panasonic Electronic Components", Operating Temperature="-55°C ~ 155°C", Package / Case="0603 (1608 Metric)", Power (Watts)="0.1W, 1/10W", Supplier Device Package=0603, Temperature Coefficient=±100ppm/°C, Tolerance=±1%, @ qty=1500, Composition="Thick Film", Datasheets=http://industrial.panasonic.com/www-cgi/jvcr13pz.cgi?E+PZ+3+AOA0002+ERJ3EKF1004V+7+WW, Factory Stock=0, Failure Rate=-, Features="Automotive AEC-Q200", Height - Seated (Max)="0.022\" (0.55mm)", Manufacturer Part Number=ERJ-3EKF1004V, Minimum Quantity=1, Number of Terminations=2, Packaging="Cut Tape (CT)", Part Status=Active, Quantity Available=1632074, Series=ERJ, Size / Dimension="0.063\" L x 0.031\" W (1.60mm x 0.80mm)", Unit Price (USD)=0.00379, Image=//media.digikey.com/Photos/Panasonic%20Photos/MFG_ERJ-P6W%20Series.jpg
S1: library part SWITCH_TACTILE__DTS-66N-V, "Tactile Switches 6x6mm 13mm 160gf BROWN", Manufacturer=Diptronics, Actuator Height off PCB, Vertical="13 mm", Manufacturer Part Number=DTS-66N-V, Outline=6.20x6.20
U1: "IC MCU 32-Bit 72MHz 64kB FLASH LQFP48", Case/Package=LQFP, Frequency=72MHz, Manufacturer=STMicroelectronics, Max Operating Temperature=85°C, Max Power Dissipation=363mW, Max Supply Voltage=3.6V, Min Operating Temperature=-40°C, Min Supply Voltage=2V, Package="LQFP-48 STMicroelectronics", Package Quantity=250, Supplier Part Number 1=497-6063-ND, Address Bus Width=32b, Availability=Unavailable, Category=Microcontrollers, ComponentLink1Description=https://datasheet.ciiva.com/15122/getdatasheetpartid-69880-15122076.pdf?src-supplier=Verical, ComponentLink1URL=https://datasheet.ciiva.com/15122/getdatasheetpartid-69880-15122076.pdf?src-supplier=Verical, ComponentLink2Description=https://datasheet.ciiva.com/26816/stm32f103c8t6-26816902.pdf?src-supplier=IIIC, ComponentLink2URL=https://datasheet.ciiva.com/26816/stm32f103c8t6-26816902.pdf?src-supplier=IIIC, ComponentLink3Description=https://datasheet.ciiva.com/16210/cd00161566-16210248.pdf?src-supplier=Future+Electronics, ComponentLink3URL=https://datasheet.ciiva.com/16210/cd00161566-16210248.pdf?src-supplier=Future+Electronics, ComponentLink4Description=https://datasheet.ciiva.com/14100/pustm-arm-microcont-stm32f103-en-14100508.pdf?src-supplier=Distrelec, ComponentLink4URL=https://datasheet.ciiva.com/14100/pustm-arm-microcont-stm32f103-en-14100508.pdf?src-supplier=Distrelec, ComponentLink5Description=https://datasheet.ciiva.com/8054/1730126-8054942.pdf?src-supplier=Element14, ComponentLink5URL=https://datasheet.ciiva.com/8054/1730126-8054942.pdf?src-supplier=Element14, ComponentLink6Description=https://datasheet.ciiva.com/48687/001075658-da-01-en-mcu-64kb-mem-stm32f103c8t6-lqfp-48-stm-48687589.pdf?src-supplier=Conrad, ComponentLink6URL=https://datasheet.ciiva.com/48687/001075658-da-01-en-mcu-64kb-mem-stm32f103c8t6-lqfp-48-stm-48687589.pdf?src-supplier=Conrad, Core Architecture=ARM, Data Bus Width=32b, Density=64KB, Height=1.45mm, Lead Free="Lead Free", Length=7mm, Manufacturer Part Number=STM32F103C8T6, Max Frequency=72MHz, Memory Size=64KB, Memory Type=FLASH, MF=STMicroelectronics, MP=STM32F103C8T6, Number of ADC Channels=10, Number of Bits=32, Number of Pins=48, Number of Programmable I/O=48, Number of PWM Channels=1, Number of SPI Channels=2, Number of Timers/Counters=4, Number of I2C Channels=2, Number of I/Os=37, Oscillator Type=Internal, Packaging=Tray, Peripherals="POR,PWM,WDT,DMA,Temp Sensor,I2C", Price=None, Pricing 1="1=7,00000, 10=6,28800, 25=5,94440, 80=5,15175, 250=4,88756, 500=4,40320 (USD)", Radiation Hardening=No, RAM Size=20KB, REACH SVHC="No SVHC", RoHS=Yes, Supplier 1=Digi-Key, Termination=SMD/SMT, Watchdog Timer=Yes, Width=7.2mm, Interface=I2C,SPI,USB,CAN,IrDA,UART,USART,LIN
U2: "Low-Power Dual Bus Buffer Gate With 3-State Outputs 8-VSSOP -40 to 85", Case/Package=VSSOP, High Level Output Current=-4mA, Low Level Output Current=4mA, Manufacturer="Texas Instruments", Max Operating Temperature=85°C, Max Supply Voltage=3.6V, Min Operating Temperature=-40°C, Min Supply Voltage=800mV, Package Quantity=3000, Quiescent Current=500nA, ComponentLink1Description=http://www.ti.com/lit/ds/symlink/sn74aup2g125.pdf?src-supplier=Digi-Key, ComponentLink1URL=http://www.ti.com/lit/ds/symlink/sn74aup2g125.pdf?src-supplier=Digi-Key, ComponentLink2Description=http://www.ti.com/general/docs/lit/getliterature.tsp?genericPartNumber=SN74AUP2G125&&fileType=pdf&src-supplier=Avnet, ComponentLink2URL=http://www.ti.com/general/docs/lit/getliterature.tsp?genericPartNumber=SN74AUP2G125&&fileType=pdf&src-supplier=Avnet, Lead Free="Lead Free", Logic Function=Buffer,Inverting, Manufacturer Part Number=SN74AUP2G125DCUR, Mount="Surface Mount", Number of Bits=2, Number of Bits per Element=1, Number of Channels=2, Number of Elements=2, Number of Output Lines=4, Number of Outputs=2, Number of Pins=8, Number of Input Lines=4, Number of Inputs=2, Output Type=3-STATE, Packaging="Tape and Reel", Polarity=Non-Inverting, Propagation Delay=6.5ns, RoHS Compliant=Yes, Series=74AUP, Stock 1=0, Supplier 1=Avnet, Supplier Part Number 1=SN74AUP2G125DCUR, Technology=CMOS
U3 U7: "TVS DIODE 5VWM 14.5VC SOT363", Capacitance @ Frequency="3pF @ 1MHz", Current - Peak Pulse (10/1000µs)="28A (8/20µs)", Manufacturer="ON Semiconductor", Operating Temperature="-40°C ~ 125°C (TJ)", Package / Case="6-TSSOP, SC-88, SOT-363", Power - Peak Pulse=500W, Power Line Protection=No, Supplier Device Package=SC-88/SC70-6/SOT-363, Supplier Part Number=NUP4202W1T2GOSCT-ND, Voltage - Breakdown (Min)=6V, Voltage - Clamping (Max) @ Ipp="14.5V (Typ)", Voltage - Reverse Standoff (Typ)="5V (Max)", Applications="General Purpose", Category="Circuit Protection", ComponentLink1Description=http://www.onsemi.com/pub_link/Collateral/NUP4202W1-D.PDF, ComponentLink1URL=http://www.onsemi.com/pub_link/Collateral/NUP4202W1-D.PDF, Manufacturer Part Number=NUP4202W1T2G, Mounting Type="Surface Mount", Packaging="Cut Tape (CT)", Part Status=Active, Pricing="1=0.69, 10=0.595, 100=0.4441, 500=0.34896, 1000=0.26965 (USD)", RoHS="RoHS Compliant", Stock=8683, Supplier=Digi-Key, Type="Steering (Rail to Rail)"
U4: library part LD1117S33TR, "STMICROELECTRONICS - LD1117S33CTR - IC, V REG, LDO 3.3V, SMD", Adjustable Output Voltage Max=-, Dropout Voltage Vdo=1.1, Fixed Output Voltage Nom.=3.3, LDO Regulator Case Style=SOT-223, Manufacturer=STMICROELECTRONICS, Operating Temperature Max=125, Operating Temperature Min=-40, Operating Temperature Range="-40°C to +125", Output Current=950, Output Current Max=0.8, Primary Input Voltage=5.3, Supplier Part Number=1467779, Supply Voltage Max=15, Voltage Regulator Type="3-Terminal Fixed Positive<!--FANDB--><div class=\"features-and-benefits-container\"><div class=\"features-and-benefits-description\"><span class=\"features-benefits-value\">The LD1117S33CTR is a low drop voltage regulator able to provide up to 800mA of output current, available even in adjustable version (VREF = 1.25V). The LD1117S33CTR offers an output voltage of 3.3V. The LD1117S33CTR optimises the thermal characteristics even offering a relevant space saving effect. High efficiency is assured by NPN pass transistor. In fact in this case, the quiescent current flows mostly into the load. Only a very common 10?F minimum capacitor is needed for stability. On chip trimming allows the regulator to reach a very tight output voltage tolerance, within ± 1 % at 25", Accuracy %=1%, Adjustable Output Voltage Min=-, Automotive Qualification Standard=-, Base Number=1117, ComponentLink1Description=http://www.farnell.com/datasheets/1776449.pdf, ComponentLink1URL=http://www.farnell.com/datasheets/1776449.pdf, ComponentLink2Description=http://www.farnell.com/cad/1724369.zip, ComponentLink2URL=http://www.farnell.com/cad/1724369.zip, ComponentLink3Description=http://www.farnell.com/datasheets/2158622.pdf, ComponentLink3URL=http://www.farnell.com/datasheets/2158622.pdf, Manufacturer Part Number=LD1117S33CTR, MSL="MSL 1 - Unlimited", No. of Outputs=1, No. of Pins=4, Output Type=Fixed, Output Voltage Nom.=3.3, Packaging="Cut Tape", Pricing="5=0.282, 50=0.157, 250=0.152, 500=0.145, 1000=0.127 (GBP)", Product Range="3.3V 950", RoHS=YES, Supplier=Farnell, SVHC="No SVHC (17-Dec-2015)", Termination Type="Surface Mount Device", Input Voltage Max=15, Input Voltage Min=5.3
U5: "High-Speed CAN Transceiver with Silent Mode 8-SOIC -40 to 125", Case/Package=D, Manufacturer="Texas Instruments", Max Operating Temperature=125°C, Max Supply Current=70mA, Max Supply Voltage=5.25V, Min Operating Temperature=-40°C, Min Supply Voltage=4.75V, Operating Supply Voltage=5V, Package="SOIC-8 Texas Instruments", Package Quantity=2500, Supplier Part Number 1=296-26335-6-ND, Category="Interface ICs", Check_prices=https://www.snapeda.com/parts/SN65HVD1050DR/Texas%20Instruments/view-part/1043210/?ref=eda, ComponentLink1Description=https://datasheet.ciiva.com/26828/sn65hvd1050dr-26828644.pdf?src-supplier=IIIC, ComponentLink1URL=https://datasheet.ciiva.com/26828/sn65hvd1050dr-26828644.pdf?src-supplier=IIIC, ComponentLink2Description=https://datasheet.ciiva.com/46392/1888948-46392549.pdf?src-supplier=Element14, ComponentLink2URL=https://datasheet.ciiva.com/46392/1888948-46392549.pdf?src-supplier=Element14, ComponentLink3Description=https://datasheet.ciiva.com/1701/sn65hvd1050-1701693.pdf?src-supplier=Digi-Key, ComponentLink3URL=https://datasheet.ciiva.com/1701/sn65hvd1050-1701693.pdf?src-supplier=Digi-Key, ComponentLink4Description=https://datasheet.ciiva.com/1701/sn65hvd1050-1701694.pdf?src-supplier=Digi-Key, ComponentLink4URL=https://datasheet.ciiva.com/1701/sn65hvd1050-1701694.pdf?src-supplier=Digi-Key, ComponentLink5Description=https://datasheet.ciiva.com/1701/sn65hvd1050-1701695.pdf?src-supplier=Digi-Key, ComponentLink5URL=https://datasheet.ciiva.com/1701/sn65hvd1050-1701695.pdf?src-supplier=Digi-Key, Contact Plating=Gold, Data Rate=1Mbps, Digi-Key_Part_Number=296-26335-1-ND, Lead Free="Lead Free", Manufacturer Part Number=SN65HVD1050DR, MF="Texas Instruments", MP=SN65HVD1050DR, Nominal Supply Current=70mA, Number of Drivers=1, Number of Pins=8, Number of Receive Buffers=1, Number of Receivers=1, Number of Transceivers=1, Number of Transmit Buffers=1, Packaging="Tape and Reel", Pricing 1="1=1,69000, 10=1,51300, 25=1,43640, 100=1,18000, 250=1,10304, 500=0,97478, 1000=0,84700 (USD)", Purchase-URL=https://pricing.snapeda.com/search/part/SN65HVD1050DR/?ref=eda, Radiation Hardening=No, REACH SVHC="No SVHC", RoHS=Yes, RoHS Compliant=Yes, Series=-, SnapEDA_Link=https://www.snapeda.com/parts/SN65HVD1050DR/Texas%20Instruments/view-part/1043210/?ref=snap, Supplier 1=Digi-Key, Supply Current=70mA, Weight=0.002677oz
U6: "TVS DIODE 5.25V 17V SOT23-6", Base Part Number=USBLC6-2, Capacitance @ Frequency=-, Current - Peak Pulse (10/1000µs)="5A (8/20µs)", Manufacturer=STMicroelectronics, Operating Temperature="-40°C ~ 125°C (TJ)", Package / Case=SOT-23-6, Power Line Protection=Yes, Supplier Part Number=497-5235-2-ND, Voltage - Breakdown (Min)=6V, Voltage - Clamping (Max) @ Ipp=17V, Voltage - Reverse Standoff (Typ)=5.25V, Applications=Ethernet, Category="Circuit Protection", ComponentLink1Description=http://www.st.com/content/ccc/resource/technical/document/datasheet/06/1d/48/9c/6c/20/4a/b2/CD00050750.pdf/files/CD00050750.pdf/jcr:content/translations/en.CD00050750.pdf, ComponentLink1URL=http://www.st.com/content/ccc/resource/technical/document/datasheet/06/1d/48/9c/6c/20/4a/b2/CD00050750.pdf/files/CD00050750.pdf/jcr:content/translations/en.CD00050750.pdf, Manufacturer Part Number=USBLC6-2SC6, Mounting Type="Surface Mount", Packaging="Tape & Reel (TR)", Part Status=Active, Power - Peak Pulse=-, Pricing="3000=0.16828, 6000=0.15743, 15000=0.14657, 30000=0.14476 (USD)", RoHS="RoHS Compliant", Supplier=Digi-Key, Supplier Device Package=SOT-23-6, Type="Steering (Rail to Rail)"
X1: library part CRYSTAL__7M-16.000MAAJ-T, "Crystal 16MHz ±30ppm (Tol) ±30ppm (Stability) 18pF FUND 100Ohm 4-Pin SMD T/R", Case/Package=SMD/SMT, ESR (Equivalent Series Resistance)=100R, Frequency=16MHz, Frequency Stability=30ppm, Load Capacitance=18pF, Manufacturer=TXC, Max Operating Temperature=70°C, Min Operating Temperature=-10°C, Package Quantity=3000, Supplier Part Number 1=887-1125-6-ND, Category=Crystals, ComponentLink1Description=https://datasheet.ciiva.com/22698/1796637-22698757.pdf?src-supplier=Element14, ComponentLink1URL=https://datasheet.ciiva.com/22698/1796637-22698757.pdf?src-supplier=Element14, ComponentLink2Description=https://datasheet.ciiva.com/46431/1796637-46431980.pdf?src-supplier=Element14, ComponentLink2URL=https://datasheet.ciiva.com/46431/1796637-46431980.pdf?src-supplier=Element14, ComponentLink3Description=https://datasheet.ciiva.com/1356/number-crystal-basic-1356577.pdf?src-supplier=Element14, ComponentLink3URL=https://datasheet.ciiva.com/1356/number-crystal-basic-1356577.pdf?src-supplier=Element14, ComponentLink4Description=https://datasheet.ciiva.com/855/7m-855384.pdf?src-supplier=Digi-Key, ComponentLink4URL=https://datasheet.ciiva.com/855/7m-855384.pdf?src-supplier=Digi-Key, ComponentLink5Description=https://datasheet.ciiva.com/855/7m-855385.pdf?src-supplier=Digi-Key, ComponentLink5URL=https://datasheet.ciiva.com/855/7m-855385.pdf?src-supplier=Digi-Key, ComponentLink6Description=https://datasheet.ciiva.com/855/7m-855386.pdf?src-supplier=Digi-Key, ComponentLink6URL=https://datasheet.ciiva.com/855/7m-855386.pdf?src-supplier=Digi-Key, Depth=2.5mm, Frequency Tolerance=30ppm, Height=0.031inch, Length=3.2mm, Manufacturer Part Number=7M-16.000MAAJ-T, Mount="Surface Mount", Number of Pins=4, Packaging="Tape and Reel", Pricing 1="1=0,91000, 10=0,80500, 50=0,75240, 100=0,66500, 500=0,63000, 1000=0,52500 (USD)", REACH SVHC="No SVHC", RoHS=Yes, RoHS Compliant=Yes, Series=7M, Supplier 1=Digi-Key, Termination=SMD/SMT, Tolerance=30ppm, Width=2.5mm

## Free pads (board coordinates)
  round 0.85 hole 0.5: 1(49.956,76.049) 2(49.956,74.779) 3(49.956,73.509) 4(51.226,73.509) 4(51.226,74.779) 6(51.226,76.049)
  round 3 hole 2.2: 1(50.216,99.746) 1(88.011,72.695)

## Via types
v1: diameter 0.8, hole 0.4, Top Layer to Bottom Layer, tented both sides, 76 vias
v2: diameter 1, hole 0.5, Top Layer to Bottom Layer, tented both sides, 7 vias

## Nets (pads, with @x,y where several pads share a name; then routed paths per layer and width w, separated by ;. In a path a pad name is that pad's centre, name@x,y a point inside that pad or via, vN(x,y) a via of type N, cw(c..) or ccw(c..) an arc to the next point about the centre after c; other vN are vias at no path point)
+3V3: C2.1 C3.1 C4.1 C5.1 C6.1 C7.1 C12.1 C13.1 C15.1 C16.1 J1.4 pad.2 R1.2 R3.2 R4.2 S1.3 S1.4 U1.9 U1.24 U1.36 U1.48 U2.8 U3.5 U4.2 U5.3 U7.5 | length 190.2
  Top Layer w0.2: C5.1 43.688,86.915 44.733,87.96 U1.36 ; C4.1 45.383,96.939 U1.24 ; U1.48 50.883,85.324 C6.1 ; U1.9 52.558,92.436
  Top Layer w0.3: U3.5 33.782,93.262 34.264,93.744 v1(34.264,93.879) 34.264,94.316 ; U2.8 34.264,94.316 ; C2.1 35.084,94.316 34.264,94.316 ; C5.1 44.45,85.852 45.212,85.09 v1(45.212,83.312) ; 52.558,92.436 53.315,93.193 53.315,94.463 53.594,94.742 C3.1 ; 54.851,97.015 54.864,97.028
  Top Layer w0.4: C6.1 50.916,85.327 54.834,85.327 R1.2 54.864,85.357 54.864,86.106 55.118,86.36 57.404,86.36 57.658,86.614 v1(57.658,87.122) ; S1.3 S1.4 60.01,80.772 ; U5.3 66.929,88.265 67.056,88.392 ; C15.1 C16.1 63.317,84.653 60.01,81.346 60.01,80.772 ; U7.5 73.66,84.005 73.426,83.77 72.086,83.77 71.12,82.804 71.12,81.788 70.104,80.772 60.01,80.772
  Top Layer w0.6: C4.1 48.184,96.952 ; C3.1 54.851,97.015
  Top Layer w0.8: 41.505,74.779 pad.2
  Top Layer w1: J1.4 30.011,98.806 30.558,99.352 ; R4.2 30.558,99.352 ; R3.2 41.681,101.321 41.656,101.346 ; C15.1 67.056,88.392 67.056,94.742 64.77,97.028 54.864,97.028 48.26,97.028 47.244,98.044 47.244,100.584 46.482,101.346 41.656,101.346 ; 30.558,99.352 30.558,100.76 31.144,101.346 41.656,101.346
  Bottom Layer w0.4: 42.164,76.2 45.466,76.2 46.99,77.724 46.99,81.534 v1(45.212,83.312) ; v1(57.658,87.122) 57.658,81.545 60.01,79.194 S1.4
  Bottom Layer w0.6: 30.48,93.98 30.581,93.879 v1(34.264,93.879)
  Bottom Layer w1: J1.4 29.894,98.806 30.48,98.22 30.48,93.98 30.48,87.376 29.464,86.36 29.464,82.804 35.16,77.108
  other v2: 36.83,73.66 34.29,74.93 35.56,74.93 36.83,74.93 36.83,76.2
+VBUS: C10.1 C11.1 J4.1 U4.3 U6.5 | length 19.4
  Top Layer w0.3: U6.5 v1(41.656,84.074)
  Bottom Layer w0.3: 41.656,81.28 v1(41.656,84.074)
  Bottom Layer w1: J4.1 33.96,85.928 38.608,81.28 41.656,81.28 44.043,81.28 v2@44.261,81.062 ; v2(44.288,81.089) 44.288,81.035 44.704,80.619 v2(44.704,79.756)
+VCAN: J3.4 R15.1 | length 3.8
  Top Layer w0.4: R15.1 84.643,91.9 J3.4
BOOT0: R2.2 S1.1 S1.2 U1.44 | length 31.2
  Top Layer w0.2: 48.235,86.081 48.883,86.729 U1.44
  Top Layer w0.3: 48.235,86.081 48.235,82.306 51.497,79.044 S1.2 S1.1 ; v1(60.982,76.375) 61.016,76.408 62.12,76.408 R2.2
  Bottom Layer w0.3: S1.1 55.51,76.126 55.758,76.375 v1(60.982,76.375)
BOOTMODE: R7.1 U1.43 | length 28.2
  Top Layer w0.2: 47.676,86.169 47.676,86.284 48.383,86.991 U1.43
  Top Layer w0.3: 47.676,86.169 47.676,82.067 51.46,78.283 54.127,78.283 54.61,77.8 v1(54.61,77.14) ; R7.1 64.16,76.492 64.16,77.447 64.336,77.622 v1(65.126,77.622)
  Bottom Layer w0.3: v1(54.61,77.14) 64.508,77.14 64.99,77.622 v1(65.126,77.622)
CANH: L1.3 R10.2 | length 2.5
  Top Layer w0.4: R10.2 75.969,90.16 78.466,90.16 L1.3
CANL: L1.1 R14.2 | length 2.5
  Top Layer w0.4: R14.2 75.987,87.622 78.448,87.622 L1.1
CANMODE: R17.2 U1.14 U5.8 | length 26.9
  Top Layer w0.2: U1.14 50.383,95.582
  Top Layer w0.3: 50.383,95.582 50.559,95.758 v1(51.652,95.758) ; U5.8 69.756,92.202 ; v1(69.756,93.632) 69.756,92.202 ; R17.2@72.377,92.456 R17.2 72.149,92.202 69.756,92.202
  Bottom Layer w0.3: v1(51.652,95.758) 67.63,95.758 v1(69.756,93.632)
CANRX: R11.1 U1.45 | length 21.4
  Top Layer w0.2: 49.022,85.598 49.383,85.959 U1.45
  Top Layer w0.4: 49.022,85.598 49.022,82.296 50.038,81.28 57.404,81.28 60.422,84.298 R11.1
CANTX: R12.1 U1.46 | length 23.1
  Top Layer w0.2: 49.883,85.097 U1.46
  Top Layer w0.4: 49.883,85.097 49.883,82.451 50.292,82.042 56.642,82.042 59.182,84.582 59.182,90.424 59.54,90.782 R12.1
COMM_RX: U1.31 U2.3 | length 11.4
  Top Layer w0.2: 41.779,90.936 U1.31
  Top Layer w0.3: U2.3 38.223,95.754 v1(38.862,96.393) ; v1(38.862,93.853) 41.779,90.936
  Bottom Layer w0.3: v1(38.862,93.853) v1(38.862,96.393)
COMM_RX_IN: J1.2 R5.2 | length 2.7
  Top Layer w0.5: J1.2 R5.2
COMM_TX: R3.1 U1.30 U2.2 | length 12.4
  Top Layer w0.2: 42.549,91.436 U1.30
  Top Layer w0.3: U2.2 41.66,95.254 41.681,95.275 ; R3.1 41.681,95.275 ; 42.549,91.436 41.681,92.304 41.681,95.275
COMM_TX_IN: J1.1 R6.2 | length 2.8
  Top Layer w0.5: J1.1 30.086,94.996 R6.2
GND: C1.2 C2.2 C3.2 C4.2 C5.2 C6.2 C7.2 C8.2 C9.2 C10.2 C11.2 C12.2 C13.2 C14.2 C15.2 C16.2 C17.2 D1.2 D2.2 D3.2 J1.3 J4.5 pad.1@49.956,76.049 R2.1 R16.1 R17.1 U1.0 U1.8 U1.23 U1.35 U1.47 U2.1 U2.4 U2.7 U3.2 U4.1 U5.2 U6.2 U7.2 X1.2 X1.4 | length 15.7
  Top Layer w0.2: U1.35 45.756,88.936 45.839,89.019 45.966,89.019 v1(48.133,91.186) 48.883,91.936 U1.8 ; U1.23 45.883,93.509 46.482,92.91 v1(46.482,92.71) ; v1(49.784,89.662) 49.784,89.462 50.383,88.863 U1.47
  Top Layer w0.3: U2.7 35.542,95.254 v1(35.546,95.25)
  Top Layer w0.6: C6.2 50.908,83.75 51.522,83.75 ; v1(51.5,82.912) 51.522,82.934 51.522,83.75 ; C7.2 52.137,83.75 51.522,83.75
  other v1: 28,71 32,71 45,71 49,71 53,71 63,71 68,71 72,71 82.042,71.374 85,75 90,77 70,79 35.052,79.248 39.878,79.248 86,80 33.528,81.28 90,82 43.688,83.058 76,85 79,85 37.35,86.103 40.562,86.233 52.324,86.868 90,87 35.858,87.206 40.335,89.088 58.674,91.948 65.532,92.202 49.784,92.71 75,93 79,93 90,93 86,94 57.912,94.234 65.024,94.234 44.45,94.996 42.926,96.012 67,98 90,98 58,99 43.18,99.822 45.974,99.822 54,101 62,101 70,101 76,101 82,101 87,101
GND_CAN: D4.2 J3.1 | length 8.7
  Top Layer w0.4: D4.2 85.344,82.296 87.326,84.278 J3.1
NetC8_1: C8.1 U1.6 X1.1 | length 5.7
  Top Layer w0.2: U1.6 54.515,90.936 55.03,91.451 X1.1@55.03,91.524 ; C8.1 54.868,93.468 X1.1
NetC9_1: C9.1 U1.5 X1.3 | length 7.7
  Top Layer w0.2: U1.5 55.718,90.436 56.73,89.424 X1.3@56.73,89.324 ; C9.1 56.568,87.53 X1.3
NetC14_1: C14.1 U5.5 | length 2.4
  Top Layer w0.4: U5.5 69.78,86.971 C14.1
NetC17_1: C17.1 J4.0 R16.2
NetD1_1: D1.1 R7.2 | length 5.5
  Top Layer w0.3: R7.2 65.29,74.892 65.735,75.336 65.735,76.632 66.091,76.987 D1.1
NetD2_1: D2.1 R8.2 | length 2
  Top Layer w0.3: R8.2 28.022,78.365 28.022,76.524 D2.1
NetD3_1: D3.1 R9.2 | length 2.1
  Top Layer w0.3: R9.2 33.903,99.257 35.693,99.257 D3.1
NetD4_1: D4.1 R15.2 | length 9.2
  Top Layer w0.4: D4.1@81.534,84.836 81.534,85.048 81.026,85.556 81.026,92.476 81.26,92.71 R15.2
NetJ3_2: J3.2 L1.5 | length 3.9
  Top Layer w0.4: L1.5 83.693,87.767 87.259,87.767 J3.2@87.376,87.884
NetJ3_3: J3.3 L1.4 | length 3.9
  Top Layer w0.4: L1.4 83.709,90.017 87.243,90.017 J3.3@87.376,89.884
NetJ4_2: J4.2 U6.1 | length 9
  Top Layer w0.4: J4.2 31.369,85.168 31.369,86.761 31.603,86.995 34.417,86.995 36.388,85.024 U6.1
NetJ4_3: J4.3 U6.3 | length 5.7
  Top Layer w0.4: J4.3 35.052,84.328 36.195,83.185 37.728,83.185 U6.3
NetR4_1: R4.1 R5.1 U2.5 U3.4 | length 11.3